# EAGLE board attiny85 (EAGLE 9.6.2)
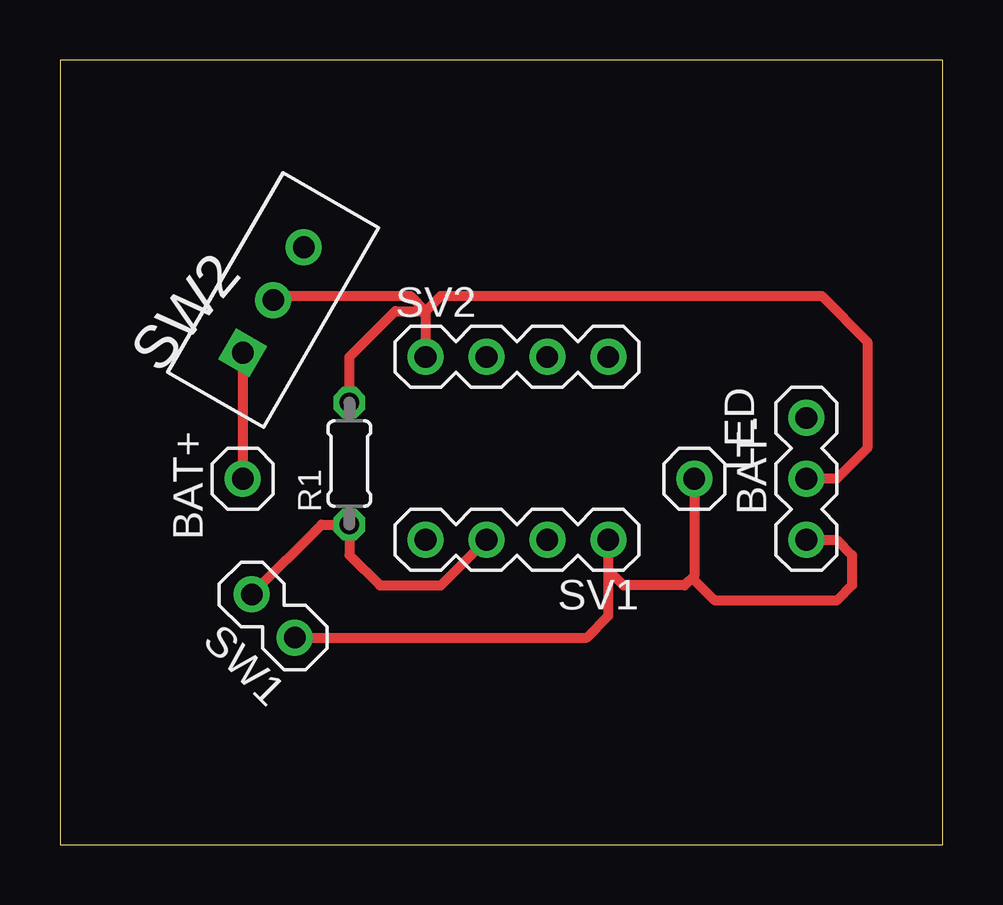
[diagram p0: board, top side]
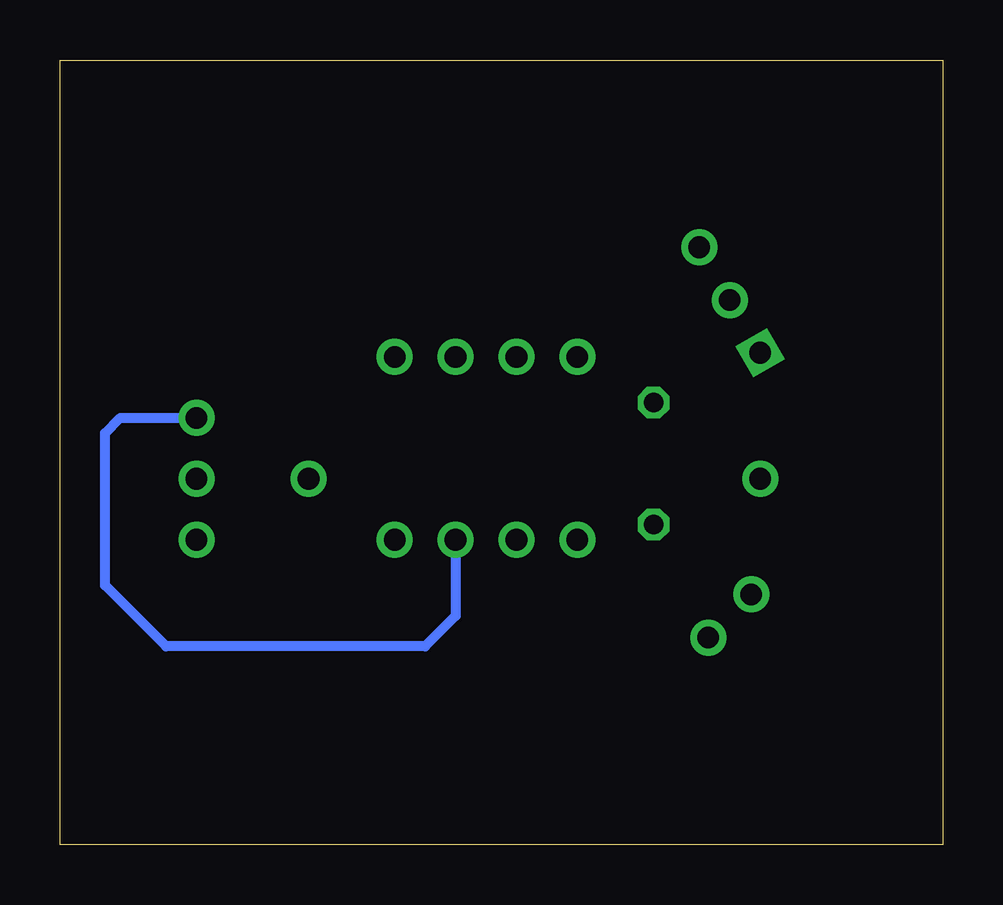
[diagram p1: board, bottom side, seen from below]

Size 36.81 x 32.69 mm. Coordinates in mm from the lower left corner, seen from the top.
Outline: 0,0 36.81,0 36.81,32.69 0,32.69 0,0
Copper layers (1*16): Top 0.035mm / dielectric 1.5mm / Bottom 0.035mm
Design rules "default": minimum track width 6mil, minimum drill 0.35mm, track to track 6mil, track to pad 6mil, pad to pad 6mil, via to via 6mil, smd to smd 6mil, copper to edge 40mil, drill to drill 6mil, minimum pad ring 10mil, minimum via ring 8mil, stop-mask expansion 4mil, vias tented up to drill 0mil, thermal gap 10mil

## Footprints (pad centres in the part's own frame; a part is rotated, then mirrored left to right if it is on the bottom)
PINHEAD-MA01-1 = drill 0.9 pad 1.5: 1 1.27,0
PINHEAD-MA03-1 = drill 0.9 pad 1.5: 1 -1.27,0; 2 1.27,0; 3 3.81,0
0204/5 = drill 0.813 octagon: 1 -2.54,0; 2 2.54,0
PINHEAD-MA04-1 = drill 0.9 pad 1.5: 1 -3.81,0; 2 -1.27,0; 3 1.27,0; 4 3.81,0
PINHEAD-MA02-1 = drill 0.9 pad 1.5: 1 -1.27,0; 2 1.27,0
SW3-1 = drill 0.9 pad 1.5 square: 1 -1.27,0 | drill 0.9 pad 1.5: 2 1.27,0; 3 3.81,0

## Placement (x,y rotation side)
BAT+  [PINHEAD-MA01-1]  6.35,15.24 0 top
BAT-  [PINHEAD-MA01-1]  25.17,15.24 0 top
LED  [PINHEAD-MA03-1]  31.12,13.97 90 top
R1  [0204/5]  12.07,15.88 90 top
SV1  [PINHEAD-MA04-1]  19.05,12.7 180 top
SV2  [PINHEAD-MA04-1]  19.05,20.32 0 top
SW1  [PINHEAD-MA02-1]  8.89,9.52 135 top
SW2  [SW3-1]  8.25,21.59 60 top

## Library data of the parts
BAT+ BAT- SW1 = ytani1
LED SV1 SV2 = ytani1; OC_FARNELL: unknown; OC_NEWARK: unknown
R1 = rcl; SPICEPREFIX: R
SW2 = ytani1; MF: HiLetgo; URL_AMAZON: https://www.amazon.co.jp/gp/product/B01LYVYQNO/

## Nets
+3V3: BAT+.1 SW2.1
BAT+: LED.2 R1.2 SV2.1 SW2.2
GND: BAT-.1 LED.1 SV1.1 SW1.1
PB3: R1.1 SV1.3 SW1.2
PB4: LED.3 SV1.2

## Tracks (layer width: path | path; a pad name or v marks a point on that pad's centre or on a via)
+3V3
  Top 0.406: SW2.1 BAT+.1
BAT+
  Top 0.406: SW2.2 9.06,22.86 14.61,22.86 15.24,22.23 | 15.24,22.23 SV2.1 | R1.2 12.07,20.32 13.97,22.23 15.24,22.23 | 15.24,22.23 15.88,22.86 31.75,22.86 33.66,20.95 33.66,16.51 32.38,15.24 LED.2
GND
  Top 0.406: SW1.1 21.96,8.63 22.86,9.52 22.86,11.43 | 22.86,11.43 SV1.1 | BAT-.1 26.45,11.2 | 26.45,11.2 26.03,10.79 23.49,10.79 22.86,11.43 | LED.1 32.38,12.7 33.02,12.06 33.02,10.79 32.38,10.16 27.3,10.16 26.45,11.02 26.45,11.2
PB3
  Top 0.406: SV1.3 15.88,10.79 13.34,10.79 12.07,12.06 R1.1 10.9,13.33 SW1.2
PB4
  Bottom 0.406: SV1.2 20.32,9.52 21.59,8.25 32.38,8.25 34.92,10.79 34.92,17.14 34.29,17.78 LED.3